# Altium PCB BOOSTXL-AUDIO_EVM.PcbDoc
Units mil, origin at the board's own origin, x right, y up, seen from the top; angles counter-clockwise.
Board outline 2300 x 3000 mil, 2 copper layers (Top Layer, Bottom Layer), stack 62 mil thick; 84 components, 83 nets, 242 pads, 141 vias.
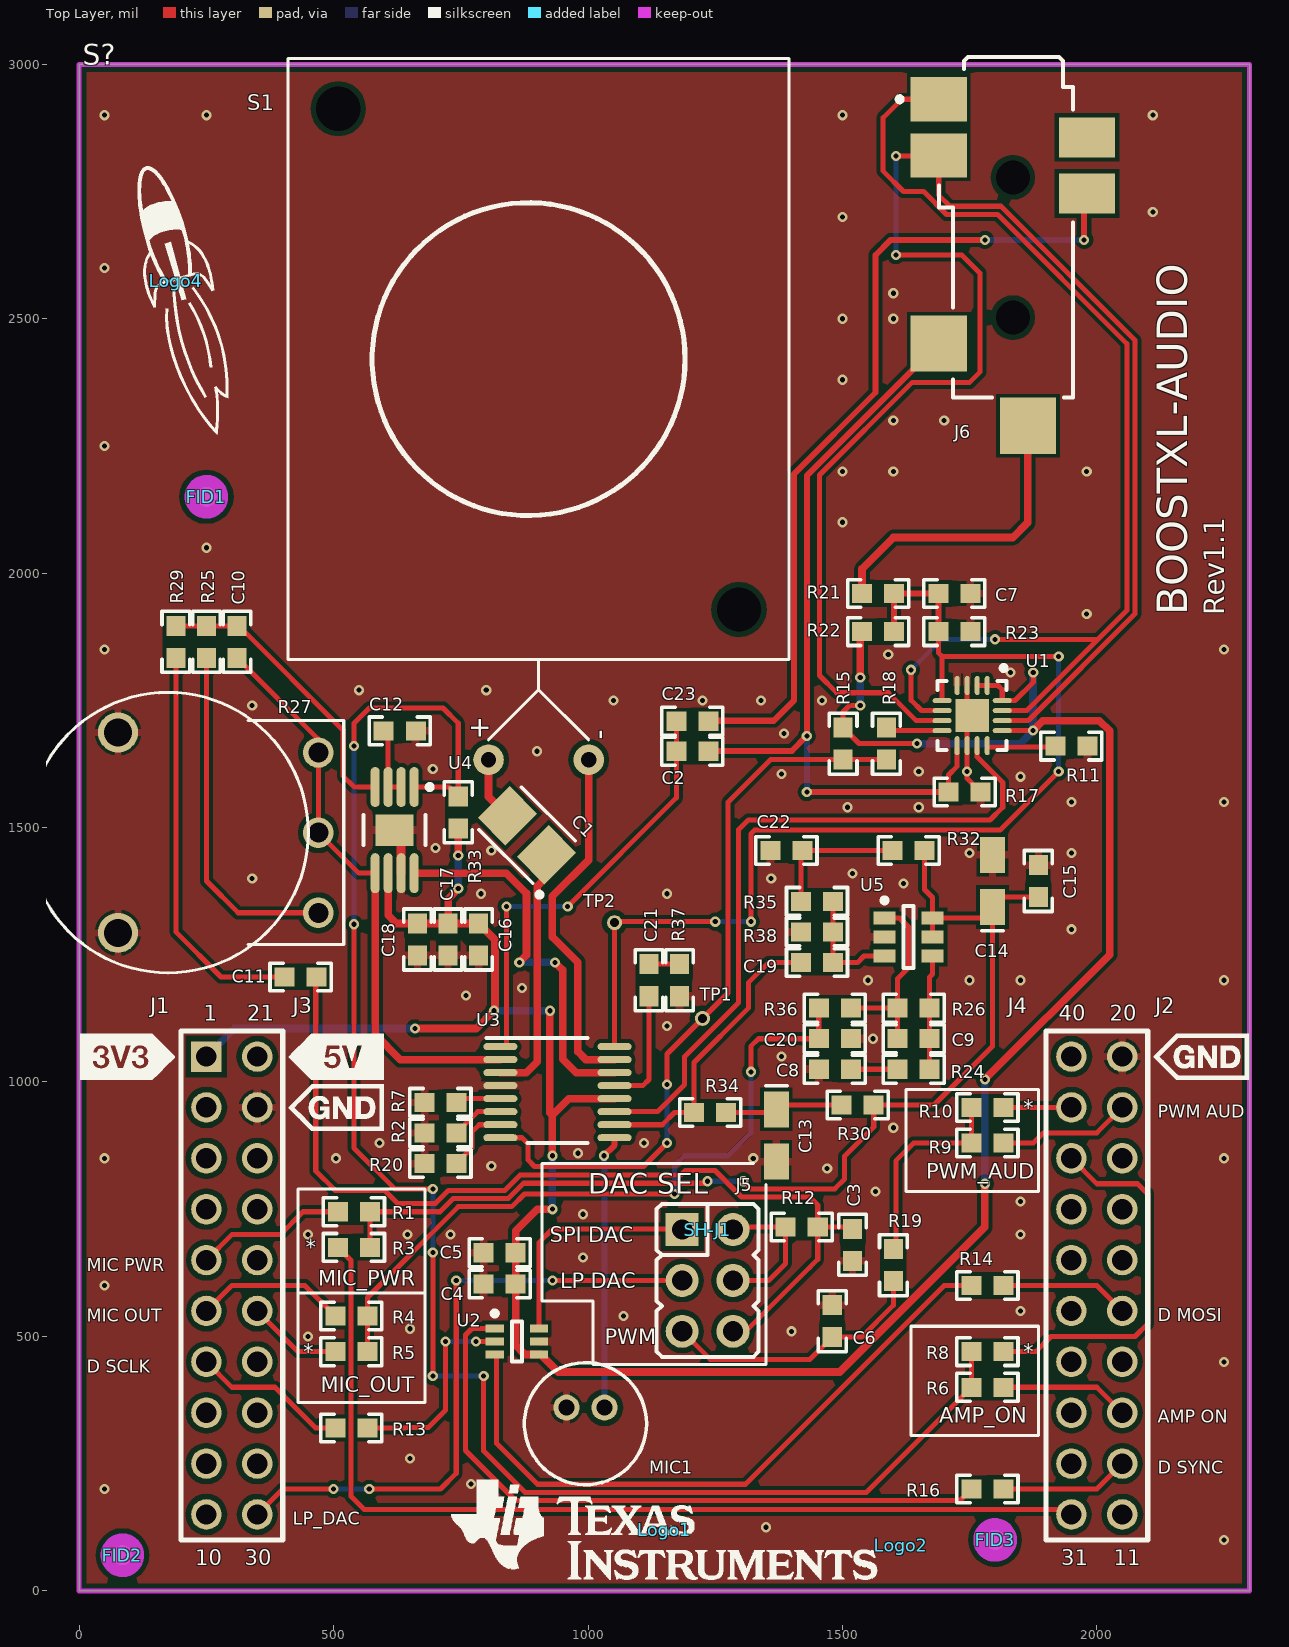
[diagram p0: Top Layer view]
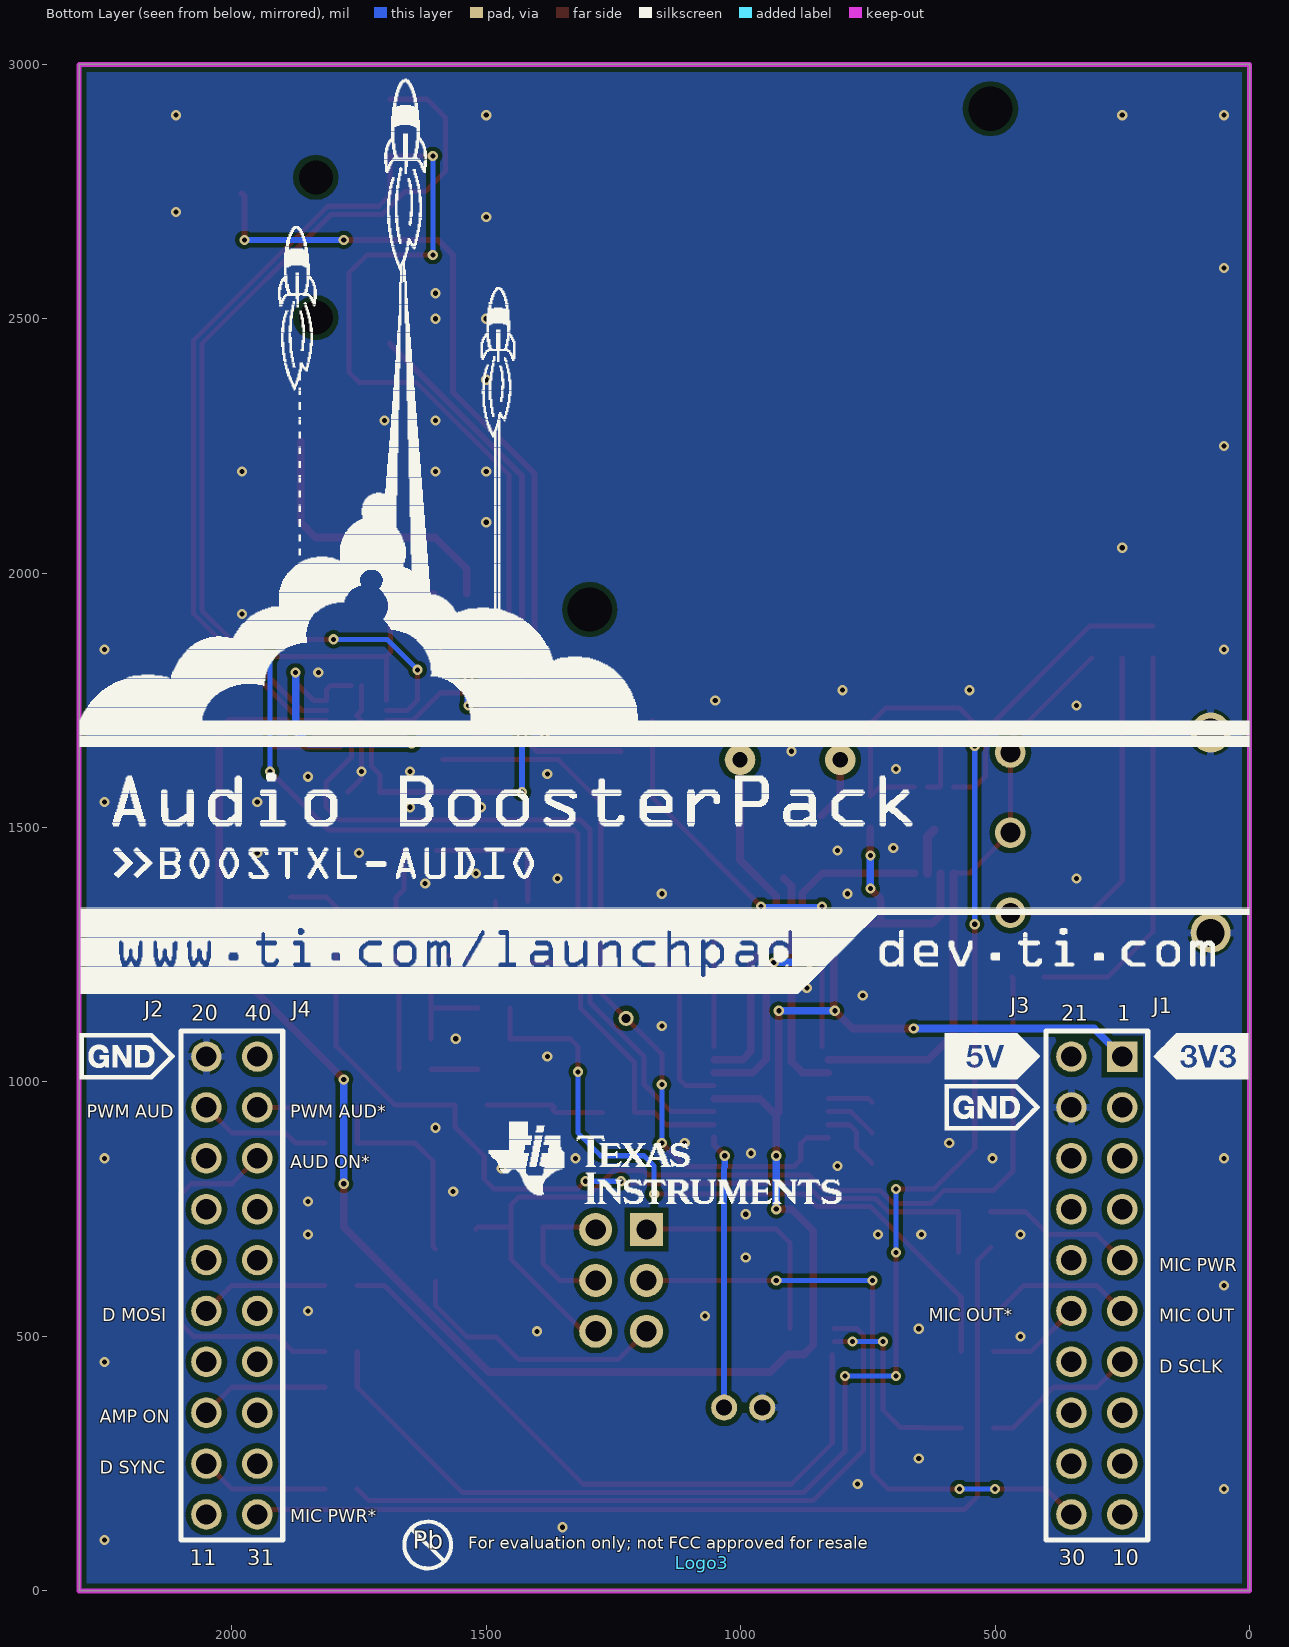
[diagram p1: Bottom Layer view, seen from below]

## Layer stack, top to bottom
Top Solder: solder mask 0.4, Solder Resist, Dk 3.5
Top Layer: signal copper 1.4
Dielectric1: core 59.2, FR-4, Dk 4.8
Bottom Layer: signal copper 1.4
Bottom Solder: solder mask 0.4, Solder Resist, Dk 3.5

## Board outline
0,0 0,3000 2300,3000 2300,0

## Design rules (kind name [scope] priority, off if disabled: settings)
AcuteAngle [All] p1: minimum=4.50000000000000E+0001 checktracksonly=FALSE
AssemblyTestPointUsage [All] p1: valid=2
Clearance Clearance_BoardEdge_MountingHoles [OnCopper and InComponentClass('Mounting Holes') vs IsKeepOut] p1: gap=20
Clearance Clearance_BoardEdge_Poly [OnCopper and InPoly vs IsKeepOut] p2: gap=10
Clearance Clearance_Poly [InPolygon] p3: gap=8 except(10.5: THPad-Poly)
Clearance [All] p4: gap=6
ComponentClearance ComponentClearance_Shunt [InComponentClass('Header') vs InComponentClass('Shunt')] p1 off: gap=0 collisioncheckmode=3 verticalgap=0 showdistances=FALSE
ComponentClearance ComponentClearance_Logo [InComponentClass('Logo')] p2 off: gap=50 collisioncheckmode=3 verticalgap=10 showdistances=FALSE
ComponentClearance ComponentClearance_ScrewToNut [(HasFootprint('NY PMS 440 0025 PH')) vs (HasFootprint('Keystone_1902C'))] p3 off: gap=5 collisioncheckmode=3 verticalgap=10 showdistances=FALSE
ComponentClearance ComponentClearance_MountingHoles [InComponentClass('Mounting Holes')] p4 off: gap=250 collisioncheckmode=3 verticalgap=100000 showdistances=FALSE
ComponentClearance ComponentClearance_SmallPassives [HasFootprint('0201*') or HasFootprint('0402*') or HasFootprint('0508') or HasFootprint('0603*') or HasFootprint('0612') or HasFootprint('0805*') or HasFootprint('0815*') or HasFootprint('0830*') or HasFootprint('1206*') or HasFootprint('1210*') or HasFootprint('1808*') or HasFootprint('1812*') or HasFootprint('1825*') or HasFootprint('2010*') or HasFootprint('2220*') or HasFootprint('2225*') or HasFootprint('2512*') or HasFootprint('2728*') or HasFootprint('3518*') vs HasFootprint('0201*') or HasFootprint('0402*') or HasFootprint('0508') or HasFootprint('0603*') or HasFootprint('0612') or HasFootprint('0805*') or HasFootprint('0815*') or HasFootprint('0830*') or HasFootprint('1206*') or HasFootprint('1210*') or HasFootprint('1808*') or HasFootprint('1812*') or HasFootprint('1825*') or HasFootprint('2010*') or HasFootprint('2220*') or HasFootprint('2225*') or HasFootprint('2512*') or HasFootprint('2728*') or HasFootprint('3518*')] p5 off: gap=20 collisioncheckmode=3 verticalgap=10 showdistances=FALSE
ComponentClearance ComponentClearance_THtoSMT [IsThruComponent vs IsSMTComponent] p6 off: gap=100 collisioncheckmode=3 verticalgap=30 showdistances=FALSE
ComponentClearance ComponentClearance_THtoTH [IsThruComponent vs IsThruComponent] p7 off: gap=118.11 collisioncheckmode=3 verticalgap=30 showdistances=FALSE
ComponentClearance [All] p8 off: gap=40 collisioncheckmode=3 verticalgap=10 showdistances=FALSE
DiffPairsRouting [All] p1: maxlimit=100 minlimit=10 mostfreqgap=10 toplayer_minwidth=15 toplayer_maxwidth=15 toplayer_prefwidth=15 bottomlayer_minwidth=15 bottomlayer_maxwidth=15 bottomlayer_prefwidth=15 maxuncoupledlength=1000
FabricationTestPointUsage TestPointUsage [All] p1: valid=2 allowmultiple=FALSE
FabricationTestpoint Testpoint [All] p1: side=3 testpointundercomponent=TRUE minsize=40 maxsize=100 preferedsize=60 minholesize=0 maxholesize=40 preferedholesize=32 testpointgrid=1 allowsidetop=TRUE allowsidebottom=TRUE usegrid=TRUE gridtolerance=0.01
FanoutControl Fanout_LCC [IsLCC] p1: bgadir=Out bgaviamode=Centered fanoutstyle=Auto fanoutdirection=Alternating viagrid=1 // Fanout_LCC (Default Rule)
FanoutControl Fanout_BGA [IsBGA] p2: bgadir=Out bgaviamode=Centered fanoutstyle=Auto fanoutdirection=Alternating viagrid=1 // Fanout_BGA (Default Rule)
FanoutControl Fanout_Default [All] p4: bgadir=Out bgaviamode=Centered fanoutstyle=Auto fanoutdirection=Alternating viagrid=1 // Fanout_Default (Default Rule)
FanoutControl Fanout_Small [(CompPinCount < 5)] p5: bgadir=Out bgaviamode=Centered fanoutstyle=Auto fanoutdirection=OutThenIn viagrid=1 // Fanout_Small (Default Rule)
HoleSize [All] p1: absolutevalues=TRUE maxlimit=251 minlimit=7 maxpercent=80.000 minpercent=20.000
MinimumAnnularRing MinimumAnnularRing_ThermalPadVias [IsVia and InAnyComponent] p1: minimumring=5.91
MinimumAnnularRing [All] p2: minimumring=2
MinimumSolderMaskSliver MinimumSolderMaskSliver_Logo [InComponentClass('Logo') vs InComponentClass('Logo')] p1: minsoldermaskwidth=0.7
MinimumSolderMaskSliver [All] p2: minsoldermaskwidth=3.94
PlaneClearance [All] p1: clearance=10
PlaneConnect [All] p1: planeconnectstyle=Relief reliefexpansion=10 reliefentries=4 reliefconductorwidth=10 reliefairgap=10
PolygonConnect PolygonConnect_via [IsVia] p1: connectstyle=Direct reliefconductorwidth=10 reliefentries=4 polygonreliefangle="90 Angle" airgapwidth=10
PolygonConnect [All] p2: connectstyle=Relief reliefconductorwidth=15 reliefentries=4 polygonreliefangle="90 Angle" airgapwidth=6
RoutingVias ThermalPadVias [IsVia and InAnyComponent] p1: holewidth=7.87 width=19.68 viastyle="Through Hole" minholewidth=7.87 minwidth=19.68 maxholewidth=12.99 maxwidth=23.62
RoutingVias [All] p2: holewidth=10 width=20 viastyle="Through Hole" minholewidth=6 minwidth=16 maxholewidth=40 maxwidth=65
SMDToCorner [All] p1: distance=30000
SilkToSilkClearance [All] p1: silktosilkclearance=5
SilkToSolderMaskClearance SilkscreenOverComponentPads [IsPad] p1 off: minsilkscreentomaskgap=5 clearancetoexposedcopper=TRUE
SolderMaskExpansion SolderMaskExpansion_vias [IsVia] p1: expansion=-25
SolderMaskExpansion [All] p2: expansion=3
UnpouredPolygon [All] p1: allowunpoured=FALSE
Width "Schematic Width Constraint" [InNet('+5.0V')] p1: maxlimit=20 minlimit=15 preferedwidth=15
Width [All] p2: maxlimit=100 minlimit=6 preferedwidth=10 checkconnectedcopper=TRUE
14 further rules are at their usual default settings.

## Classes and differential pairs
component class Shunt: SH-J1
component class Logo: Logo1
component class BOOSTXL-AUDIO_EVM_Hardware: FID1 FID2 FID3 Logo1 Logo2 Logo3 Logo4 S? ZZ1 ZZ2 ZZ3 ZZ4
component class FiducialMark: FID1 FID2 FID3
component class AssemblyNote: ZZ1 ZZ2 ZZ3 ZZ4
component class BOOSTXL-AUDIO_Main: C1 C2 C3 C4 C5 C6 C7 C8 C9 C10 C11 C12 C13 C14 C15 C16 C17 C18 C19 C20 C21 C22 C23 J1 J5 J6 MIC1 R1 R2 R3 R4 R5 R6 R7 R8 R9 R10 R11 R12 R13 R14 R15 R16 R17 R18 R19 R20 R21 R22 R23 R24 R25 R26 R27 R29 R30 R32 R33 R34 R35 R36 R37 R38 S1 SH-J1 TP1 TP2 U1 U2 U3 U4 U5
component class Header: J5

## Components (designator, comment, footprint, x,y, rotation, side; value= is the part's Value field where it differs from the comment)
C1 "TPSB476K010R0250" 3528-21 880,1485 r135 top
C2 "C1608X5R1A106M" 0603 1205,1650 r0 top
C3 "GRM188R71C823KA01D" 0603 1520,680 r90 top
C4 "C1608X5R1A106M" 0603 826.19,603.1 r180 top
C5 "GRM188R70J104KA01D" 0603 826.19,664.42 r180 top
C6 "C0603C334K8RACTU" 0603 1480,530 r90 top
C7 "GRM188R71C105KA12D" 0603 1720,1960 r180 top
C8 "GRM188R60J474KA01D" 0603 1485,1025 r0 top
C9 "GRM1885C2A510JA01D" 0603 1640,1085 r180 top
C10 "CC0603CRNPO9BN5R0" 0603 310,1865 r270 top
C11 "GRM188R71A564KA61D" 0603 435,1206.5 r0 top
C12 "GRM188R61A225KE34D" 0603 630,1690 r0 top
C13 "TPSA475K010R1400" 3216-18 1370,895 r270 top
C14 "TPSA475K010R1400" 3216-18 1795,1395 r90 top
C15 "GRM188R70J104KA01D" 0603 1885,1395 r90 top
C16 "C1608X5R1A106M" 0603 785,1280 r90 top
C17 "GRM188R70J104KA01D" 0603 725,1280 r90 top
C18 "GRM188R61A225KE34D" 0603 665,1280 r270 top
C19 "GRM188R61A154KA01D" 0603 1450,1235 r0 top
C20 "C0603C153K1RACTU" 0603 1485,1085 r0 top
C21 "GRM188R70J104KA01D" 0603 1120,1200 r270 top
C22 "GRM188R60J474KA01D" 0603 1390,1455 r0 top
C23 "C1608X5R1A106M" 0603 1205,1708.96 r0 top
FID1 "Fiducial" Fiducial10-20 250,2150 r0 top
FID2 "Fiducial" Fiducial10-20 85,70 r0 top
FID3 "Fiducial" Fiducial10-20 1800,100 r0 top
J1 "CRD-081413-A-G (requires 2)" "40Pin BP" 1150,600 r0 top
J5 "PBC03DAAN" Sullins_PBC03DAAN 1235,610 r0 top
J6 "SJ-43516-SMT-TR" CUI_SJ-43516-SMT 1835,2640 r0 top
Logo1 "Texas Instruments" TI_Stacked_Overlay_Small 1150,120 r0 top
Logo2 "Pb-Free Symbol" Pb-Free_Overlay_Small 1615,90 r180 top
Logo3 "FCC disclaimer" FCC_disclaimer 1076.52,55.48 r180 bottom
Logo4 "LaunchPad Rocket" LaunchPadRocket_Small 190,2575 r65 top
MIC1 "POM-2242P-C33-R" MIC_POM-2242P-C33-R 995,360 r180 top
R1 "CRCW06030000Z0EA" 0603 540,745 r180 top
R2 "CRCW060350R0FKEA" 0603 710,900 r180 top
R3 "CRCW06030000Z0EA" 0603 540,675 r180 top
R4 "CRCW06030000Z0EA" 0603 535,540 r180 top
R5 "CRCW06030000Z0EA" 0603 535,470 r180 top
R6 "CRCW06030000Z0EA" 0603 1785,400 r0 top
R7 "CRCW060350R0FKEA" 0603 710,960 r180 top
R8 "CRCW06030000Z0EA" 0603 1785,470 r0 top
R9 "CRCW06030000Z0EA" 0603 1785,880 r0 top
R10 "CRCW06030000Z0EA" 0603 1785,950 r0 top
R11 "CRCW06030000Z0EA" 0603 1950,1660 r180 top
R12 "RC0603FR-07100RL" 0603 1420,715 r0 top
R13 "CRCW06030000Z0EA" 0603 535,320 r0 top
R14 "CRCW06030000Z0EA" 0603 1785,600 r180 top
R15 "RC0603FR-0747KL" 0603 1501.3,1665 r270 top
R16 "CRCW06030000Z0EA" 0603 1785,200 r180 top
R17 "RC0603FR-0710KL" 0603 1740,1570 r0 top
R18 "RC0603FR-0720KL" 0603 1586.3,1665 r90 top
R19 "RC0603FR-07130RL" 0603 1600,640 r270 top
R20 "CRCW060350R0FKEA" 0603 710,840 r180 top
R21 "RC0603FR-0710KL" 0603 1570,1960 r0 top
R22 "CRCW0603100KFKEA" 0603 1570,1885 r0 top
R23 "RC0603FR-07220KL" 0603 1720,1885 r0 top
R24 "RC0603FR-07820RL" 0603 1640,1025 r180 top
R25 "CRCW06030000Z0EA" 0603 250,1865 r270 top
R26 "RC0603FR-07200KL" 0603 1640,1145 r180 top
R27 "RV100F-30-4K1-B15" RV100F-30-4K1-B15 470,1490 r90 top
R29 "RC0603FR-0730KL" 0603 190,1865 r90 top
R30 "RC0603FR-07470RL" 0603 1530,955 r180 top
R32 "RC0603FR-073KL" 0603 1630,1455 r0 top
R33 "CRCW0603100KFKEA" 0603 745,1530 r90 top
R34 "RC0603FR-078K2L" 0603 1240,940 r0 top
R35 "RC0603FR-0747KL" 0603 1450,1355 r180 top
R36 "RC0603FR-07820RL" 0603 1485,1145 r180 top
R37 "RC0603FR-07510RL" 0603 1180,1200 r90 top
R38 "RC0603FR-0751KL" 0603 1450,1295 r0 top
S1 "ASE03008MR-LW150-R" ASE03008MR-LW150-R 1395,1830 r90 top
S? "" BOOSTXL-AUDIO_RearSilk 2305,1160 r0 top
SH-J1 "969102-0000-DA" SNT-100-BK-G 1235,710 r180 top
TP1 "TESTPOINT" TP_H045P075 1225,1125 r90 top
TP2 "TESTPOINT" TP_H045P075 1052.2,1312.96 r90 top
U1 "TS3A225E" "QFN-16 (RTE)" 1755,1720 r270 top
U2 "DAC8311IDCKT" TI-DCK6_V 860,490 r0 top
U3 "TS3A44159PWR" PW0016A_N 940,980 r0 top
U4 "TPA301DGNG4" TI-DGN8-1760X1425TP_M 620,1495 r270 top
U5 "TLV2760IDBVTG4" DBV0006A_N 1630,1285 r0 top
ZZ1 "This Assembly Note is for PCB labels only" AssemblyNoteLabel 185,3938 r0 top
ZZ2 "These assemblies are ESD sensitive, ESD precautions shall be observed." AssemblyNote 185,3829.11 r0 top
ZZ3 "These assemblies must be clean and free from flux and all contaminants. Use of no clean flux is not acceptable." AssemblyNote 185,3740.56 r0 top
ZZ4 "These assemblies must comply with workmanship standards IPC-A-610 Class 2, unless otherwise specified." AssemblyNote 185,3652 r0 top

## Footprints (in the part's own frame and the unit in brackets; to place one, negate y for a bottom-side part, rotate by r counter-clockwise, add the part's x,y. Pads: shape width x height; smd on the part's side, far side on the other; paste and mask are expansions set on the pad)
"40Pin BP" [mil] "40Pin Booster Pack Connection (Top - male; Bottom - female)"
  rect 60x60 hole 40: 1(-900,450)
  round 60 hole 40: 2(-900,350) 3(-900,250) 4(-900,150) 5(-900,50) 6(-900,-50) 7(-900,-150) 8(-900,-250) 9(-900,-350) 10(-900,-450) 11(900,-450) 12(900,-350) 13(900,-250) 14(900,-150) 15(900,-50) 16(900,50) 17(900,150) 18(900,250) 19(900,350) 20(900,450) 21(-800,450) 22(-800,350) 23(-800,250) 24(-800,150) 25(-800,50) 26(-800,-50) 27(-800,-150) 28(-800,-250) 29(-800,-350) 30(-800,-450) 31(800,-450) 32(800,-350) 33(800,-250) 34(800,-150) 35(800,-50) 36(800,50) 37(800,150) 38(800,250) 39(800,350) 40(800,450)
  silkscreen extent -1148,305 1148,495, body extent -950,-500 950,500, height 335
0603 [mm] "0603 from SM-752 data"
  rect 1x0.95 smd: 1(-0.8,0) 2(0.8,0)
  silkscreen extent -1.52,-0.69 1.52,0.69, body extent -0.87,-0.47 0.87,0.47, height 1
3216-18 [mm] "Medium density IPC, based on Kemet T495 dimensions"
  rect 1.8x1.25 smd: 1(-1.3,0) 2(1.3,0)
  silkscreen extent -2.49,-0.54 -2.49,0.54, body extent -1.7,-0.9 1.7,0.9, height 1.8
3528-21 [mm] "Medium Density IPC, based on SM-782 section 8.4"
  rect 1.95x2.25 smd: 1(-1.375,0) 2(1.375,0)
  silkscreen extent -2.66,-1.5 1.9,1.79, body extent -1.85,-1.5 1.85,1.5, height 2.1
ASE03008MR-LW150-R [mil] "PUI Speaker Enclosure 1W"
  round 60 hole 30: 1(-196.85,590.55) 2(-196.85,393.7)
  round 0 hole 86.61 unplated: ""(98.43,98.43) ""(1082.68,885.83)
  silkscreen extent -157,0 1181,984, body extent 0,0 1181,984, height 236
AssemblyNote [mil] "Assembly Note"
AssemblyNoteLabel [mil] "Assembly Note for PCB Labels"
BOOSTXL-AUDIO_RearSilk [mil]
  round 1 on Mech4: 0(-1117.87,1323.46)
CUI_SJ-43516-SMT [mm] "AUDIO JACK 3.5mm 4COND, SMT"
  rect 2.8x2.2 smd: 1(-3.7,7.4) 4(-3.7,4.6)
  rect 2.8x2.8 smd: 2(-3.7,-4.8) 5(0.75,-8.9)
  rect 2.8x2 smd: 3(3.7,2.7) 6(3.7,5.5)
  round 0 hole 1.7 unplated: MH1(0,3.5) MH2(0,-3.5)
  silkscreen extent -5.77,-7.5 3,9.5, body extent -4.5,-9.5 4.5,9.7, height 5.1
DBV0006A_N [mm] "SOT23, 6-Leads, Body 2.9x1.6mm, Pitch 0.95mm, Lead Span 2.8mm, IPC Medium Density"
  rect 1.1x0.65 smd: 1(-1.2,0.95) 2(-1.2,0) 3(-1.2,-0.95) 4(1.2,-0.95) 5(1.2,0) 6(1.2,0.95)
  silkscreen extent -1.32,-1.55 0.25,1.95, body extent -1.42,-1.46 1.42,1.46, height 1.11
FCC_disclaimer [mil]
Fiducial10-20 [mm]
  round 1 smd mask+0.5: 1(0,0)
  Top Layer keep-out circle w1.178: c0,0 r0.5
LaunchPadRocket_Small [mil]
  silkscreen extent -241,-202 182,153
MIC_POM-2242P-C33-R [mm] "POM Audio"
  round 1.3 hole 0.8: 1(-0.95,0) 2(0.95,0)
  silkscreen extent -3.05,-2.25 3.05,3.85, body extent -3.05,-2.24 3.05,3.84, height 2.5
Pb-Free_Overlay_Small [mil]
PW0016A_N [mm] "TSOP, 16-Leads, Body 5x4.4mm, Pitch 0.65mm, IPC Medium Density"
  oval 1.7x0.35 smd: 1(-2.85,2.275) 2(-2.85,1.625) 3(-2.85,0.975) 4(-2.85,0.325) 5(-2.85,-0.325) 6(-2.85,-0.975) 7(-2.85,-1.625) 8(-2.85,-2.275) 9(2.85,-2.275) 10(2.85,-1.625) 11(2.85,-0.975) 12(2.85,-0.325) 13(2.85,0.325) 14(2.85,0.975) 15(2.85,1.625) 16(2.85,2.275)
  silkscreen extent -3.55,-2.55 1.5,2.7, body extent -3.21,-2.5 3.21,2.5, height 0.98
"QFN-16 (RTE)" [mm] "QFN, 16-Leads, Body 3.00x3.00mm, Pitch 0.50mm, Thermal Pad 1.66x1.66mm, IPC Low Density"
  oval 0.95x0.25 smd: 1(-1.5,0.75) 2(-1.5,0.25) 3(-1.5,-0.25) 4(-1.5,-0.75) 9(1.5,-0.75) 10(1.5,-0.25) 11(1.5,0.25) 12(1.5,0.75)
  oval 0.25x0.95 smd: 5(-0.75,-1.5) 6(-0.25,-1.5) 7(0.25,-1.5) 8(0.75,-1.5) 13(0.75,1.5) 14(0.25,1.5) 15(-0.25,1.5) 16(-0.75,1.5)
  rect 1.66x1.66 smd: 17(0,0)
  silkscreen extent -2.5,-1.73 1.73,1.73, body extent -1.58,-1.58 1.58,1.58, height 0.8
RV100F-30-4K1-B15 [mm]
  round 1.524 hole 1: 1(-4,0) 2(0,0) 3(4,0)
  round 2 hole 1.4: GND(-5,10) GND(5,10)
  silkscreen extent -7,-1.27 7,14.5
SNT-100-BK-G [mil] "Samtec STEP model"
  round 1 on Mech3: 0(0,0)
  body extent -100,-50 100,50, height 344
Sullins_PBC03DAAN [mm] "Sullins 100mil, 2x3, 230 mil above insulator"
  rect 1.65x1.65 hole 1.016: 1(-1.27,2.54)
  round 1.65 hole 1.016: 2(1.27,2.54) 3(-1.27,0) 4(1.27,0) 5(-1.27,-2.54) 6(1.27,-2.54)
  silkscreen extent -2.54,-3.81 2.54,3.81, body extent -2.54,-3.81 2.54,3.81, height 8.38
TI-DCK6_V [mm] "SOT23, 6-Leads, Body 2x1.25mm, Pitch 0.65mm"
  rect 0.9x0.4 smd: 1(-1.1,0.65) 2(-1.1,0) 3(-1.1,-0.65) 4(1.1,-0.65) 5(1.1,0) 6(1.1,0.65)
  silkscreen extent -1.22,-1 0.25,1.52, body extent -0.63,-1 0.63,1, height 1.1
TI-DGN8-1760X1425TP_M [mm] "SOP, 8-Leads, Body 3.1x3.1mm, Pitch 0.65mm, Thermal Pad 1.89x1.57mm, IPC Low Density"
  oval 2x0.45 smd: 1(-2.15,0.975) 2(-2.15,0.325) 3(-2.15,-0.325) 4(-2.15,-0.975) 5(2.15,-0.975) 6(2.15,-0.325) 7(2.15,0.325) 8(2.15,0.975)
  rect 1.57x1.89 smd: 9(0,0)
  silkscreen extent -2.27,-1.55 0.75,1.88, body extent -1.55,-1.55 1.55,1.55, height 1.1
TI_Stacked_Overlay_Small [mil]
  silkscreen extent -418,-98 418,98
TP_H045P075 [mm] "TP_H0.45P0.75"
  round 0.75 hole 0.45: 1(0,0)

## Part data
C1: "CAP, TA, 47 µF, 10 V, +/- 10%, 0.25 ohm, SMD"
C2 C4 C16 C23: "CAP, CERM, 10 µF, 10 V, +/- 20%, X5R, 0603"
C3: "CAP, CERM, 0.082 µF, 16 V, +/- 10%, X7R, 0603"
C5 C15 C17 C21: "CAP, CERM, 0.1uF, 6.3V, +/-10%, X7R, 0603"
C6: "CAP, CERM, 0.33 µF, 10 V, +/- 10%, X7R, 0603"
C7: "CAP, CERM, 1 µF, 16 V, +/- 10%, X7R, 0603"
C8 C22: "CAP, CERM, 0.47uF, 6.3V, +/-10%, X5R, 0603"
C9: "CAP, CERM, 51 pF, 100 V, +/- 5%, C0G/NP0, 0603"
C10: library part Capacitor, "CAP, CERM, 5 pF, 50 V, +/- 5%, C0G/NP0, 0603"
C11: "CAP, CERM, 0.56 µF, 10 V, +/- 10%, X7R, 0603"
C12 C18: "CAP, CERM, 2.2 µF, 10 V, +/- 10%, X5R, 0603"
C13 C14: "CAP, TA, 4.7 µF, 10 V, +/- 10%, 1.4 ohm, SMD"
C19: "CAP, CERM, 0.15uF, 10V, +/-10%, X5R, 0603"
C20: "CAP, CERM, 0.015 µF, 100 V, +/- 10%, X7R, 0603"
FID1 FID2 FID3: "Fiducial mark.  There is nothing to buy or mount."
J1: library part "40Pin Booster Pack Connection", "40Pin Booster Pack Connection"
J5: "Header, 100mil, 3x2, Gold, TH"
J6: "AUDIO JACK 3.5mm 4COND, SMT"
Logo1: library part TI_Logo, "Texas Instrument Corporate Signature"
Logo2: library part Pb-Free
Logo3: library part FCC_disclaimer, "FCC_disclaimer"
Logo4: library part LaunchPad_Rocket, "LaunchPad Rocket logo"
MIC1: "Microphone, Condenser, Analog, Omnidirectional, -42DB, TH"
R1 R3 R4 R5 R6 R8 R9 R10 R11 R13 R14 R16 R25: "RES, 0, 5%, 0.1 W, 0603"
R2 R7 R20: "RES, 50, 1%, 0.1 W, 0603"
R12: "RES, 100, 1%, 0.1 W, 0603"
R15 R35: "RES, 47.0 k, 1%, 0.1 W, 0603"
R17 R21: "RES, 10.0 k, 1%, 0.1 W, 0603"
R18: "RES, 20.0 k, 1%, 0.1 W, 0603"
R19: "RES, 130, 1%, 0.1 W, 0603"
R22 R33: "RES, 100 k, 1%, 0.1 W, 0603"
R23: "RES, 220 k, 1%, 0.1 W, 0603"
R24 R36: "RES, 820 ohm, 1%, 0.1W, 0603"
R26: "RES, 200 k, 1%, 0.1 W, 0603"
R27: "Potentiometers 10mm Linear 100K PC Mount"
R29: "RES, 30.0 k, 1%, 0.1 W, 0603"
R30: "RES, 470 ohm, 1%, 0.1W, 0603"
R32: "RES, 3.00 k, 1%, 0.1 W, 0603"
R34: "RES, 8.20k ohm, 1%, 0.1W, 0603"
R37: "RES, 510, 1%, 0.1 W, 0603"
R38: "RES, 51.0 k, 1%, 0.1 W, 0603"
S1: library part "PUI Speaker Enclosure", "PUI SPEAKER ENCLOSURE 1 W 8 OHM 83 D"
S?: library part "Rear Silkscreen", "Rear Silkscreen"
SH-J1: "Shunt, 100mil, Gold plated, Black"
TP1 TP2: library part TP_H0.45P0.75, "Testpoint"
U1: "Autonomous Audio Switch with Headset Type Detection"
U2: library part CMP-0004-00352-1, "14-Bit, Single Channel, 80 uA, 1.8 to 5.5 V DAC, -40 to 125 degC, 6-pin SOT23 (DCK6), Green (RoHS & no Sb/Br)"
U3: "0.45 ohm QUAD SPDT ANALOG SWITCH QUAD-CHANNEL 2:1 MULTIPLEXER/DEMULTIPLEXER WITH TWO CONTROLS, PW0016A"
U4: library part CMP-0991-00051-1, "350-mW Mono Class-AB Audio Amplifier, -40 to 85 degC, 8-pin SOP (DGN8), Green (RoHS & no Sb/Br)"
U5: "Single MicroPower, Rail-to-Rail, Single Supply Amplifier with Shutdown, 1.8 to 3.6 V, -40 to 85 degC, 6-pin SOT23 (DBV0006A), Green (RoHS & no Sb/Br)"
ZZ1: library part AssemblyNoteLabel
ZZ2 ZZ3 ZZ4: library part AssemblyNote

## Via types
v1: diameter 20, hole 10, Top Layer to Bottom Layer, 141 vias

## Nets (pads, with @x,y where several pads share a name; then routed paths per layer and width w, separated by ;. In a path a pad name is that pad's centre, name@x,y a point inside that pad or via, vN(x,y) a via of type N, cw(c..) or ccw(c..) an arc to the next point about the centre after c; other vN are vias at no path point)
+3.3V: C4.1 C5.1 C16.2 C17.2 C18.1 J1.1 R15.1 R22.1 R33.1 U1.1 U1.2 U1.13 U1.16 U2.4 U3.12 U4.6 | length 5469.2
  Top Layer w10: v1(1535,1740) 1514.1,1740 1501.3,1727.2 R15.1 1532.8,1665 v1(1646.31,1665) ; R22.1@1535,1881.5 R22.1 ; U1.2 U1.1 1805.94,1779.06 1814.06,1770.94 U1.16 1839.27,1749.53 1875,1785.25 v1(1875,1805) ; U1.13 v1(1874.53,1690.47)
  Top Layer w15: U4.6 607.2,1327.8 623.5,1311.5 C18.1 C17.2 ; v1(660,1105) 780,1105 v1(815,1140) 817.2,1142.2 817.2,1279.3 C16.2 C17.2 ; v1(745,1380) 725,1360 C17.2 ; v1(745,1445) R33.1 ; v1(925,1140) 925,940 930,935 ; v1(930,750) 900,750 857.68,707.68 C5.1 C4.1 857.68,482.32 875.59,464.41 907.24,464.41 941.65,430 1495,430 1780,715 v1(1780,800) ; v1(930,855) 930,935 ; U3.12 962.2,967.2 930,935 ; v1(1535,1795) R22.1@1535,1881.5 ; v1(1780,1005) 2025,1250 2025,1690 2005,1710 1894.06,1710 v1(1874.53,1690.47)
  Bottom Layer w10: v1(1535,1740) 1538.5,1743.5 v1@1535,1747.01 ; v1@1874.53,1804.53 v1(1875,1805)
  Bottom Layer w15: J1.1 305,1105 v1(660,1105) ; v1(745,1380) v1(745,1445) ; v1(815,1140) v1(925,1140) ; v1(930,750) v1(930,855) ; v1@1535,1747.01 v1(1535,1795) ; v1(1646.31,1665) 1849.06,1665 v1(1874.53,1690.47) v1@1874.53,1804.53 ; v1(1780,800) v1(1780,1005)
+5.0V: J1.21
\AMP_ON_ALT: J1.38 R8.2 | length 740.3
  Top Layer w10: R8.2 1880,470 1910,500 2075,500 2100,525 2100,780 2080,800 2000,800 J1.38
\AMP_ON_PRI: J1.13 R6.2 | length 254.2
  Top Layer w10: R6.2 2000,400 J1.13
\AUDIO_SHUTDOWN: R6.1 R8.1 R33.2 U4.1 | length 3253.5
  Top Layer w10: v1(540,1310) 540,870 620,790 v1(695,790) ; v1(540,1660) 540,1705 570,1735 715,1735 745,1705 R33.2 726.85,1579.65 U4.1 ; v1(695,422) v1(695,665) ; v1(795,422) 795,275 876.55,193.45 1546.95,193.45 R6.1 R8.1
  Bottom Layer w10: v1(540,1310) v1(540,1660) ; v1(695,422) v1(795,422) ; v1(695,665) v1(695,790)
\DAC_SYNC: J1.12 R16.1 | length 254.2
  Top Layer w10: R16.1 2000,200 J1.12
AMP_AUDIO_OUT+: C10.2 R27.2 R27.3 U3.2 U4.5 | length 1138
  Top Layer w10: C10.2 470,1673.5 R27.3 R27.2 549.65,1410.35 U4.5
  Top Layer w15: U4.5 581.61,1093.39 631.02,1043.98 U3.2
AMP_AUDIO_OUT-: U3.14 U4.8 | length 758.2
  Top Layer w15: U4.8 839.65,1410.35 879,1371 879,1249 v1(865,1235) ; v1(935,1235) 950,1220 950,1045 976.61,1018.39 U3.14
  Bottom Layer w15: v1(865,1235) v1(935,1235)
AUDIO_OUT: C3.2 C11.2 J5.6 R12.2 | length 1852.1
  Top Layer w10: C11.2 465,1205 465,825 503,787 600,787 626,761 700,761 726,787 836.75,787 866.75,817 1182.3,817 1191.3,826 1249.44,826 1301.44,774 1436,774 1451.5,758.5 R12.2 ; J5.6 1310,510 1435.75,635.75 1451.5,651.5 R12.2 ; C3.2 1516.5,715 R12.2
DAC_MOSI: J1.15 R14.1 | length 254.2
  Top Layer w10: R14.1 2000,600 J1.15
DAC_SCLK: J1.7 R13.1 | length 307.4
  Top Layer w10: J1.7 300,400 385,400 465,320 R13.1
DUMMY_LOAD: C21.2 U3.13 | length 236.4
  Top Layer w10: U3.13 1107.8,992.8 1120,1005 C21.2
GND: C3.1 C4.2 C5.2 C6.2 C7.1 C8.1 C12.2 C13.2 C14.2 C15.2 C16.1 C17.1 C18.2 C20.2 C22.1 J1.20 J1.22 MIC1.2 R2.2 R7.2 R11.1 R17.2 R20.2 R23.2 R27.GND R37.1 R38.1 U1.3 U1.4 U1.10 U1.17 U2.5 U3.4 U4.7 U4.9 U5.2 | length 318.1
  Top Layer w10: U1.3 1745.16,1729.84 U1.17 1745.16,1710.16 U1.10 1745.16,1596.34 R17.2
  Top Layer w18: U4.9 632.8,1482.2 U4.7
  other v1: 2250,100 1350,125 50,200 770,210 650,260 2250,450 450,500 1400,510 650,515 1070,540 1850,550 50,600 990,655 450,700 645,700 730,700 1850,700 990,740 1850,765 1565,785 1470,830 810,835 50,850 505,850 1324.72,850 2250,850 980,860 590,880 1110,880 1600,910 1380,1050 1560,1085 1155,1110 760,1170 870,1185 1550,1200 1750,1200 1850,1200 2250,1200 1950,1300 790,1370 1155,1370 1620,1390 340,1400 1360,1400 1520,1410 1750,1450 1950,1450 810,1455 700,1460 1510,1540 1650,1540 1950,1550 2250,1550 1850,1600 1380,1605 1650,1610 1745,1610 695,1615 900,1650 1385,1685 340,1740 1050,1750 1225,1750 1340,1750 1460,1750 550,1770 800,1770 1830,1805 1590,1840 50,1850 2250,1850 1980,1920 250,2050 1500,2100 1500,2200 1600,2200 1980,2200 50,2250 1600,2300 1700,2300 1500,2380 1500,2500 1600,2500 1600,2550 50,2600 1500,2700 2110,2710 50,2900 250,2900 1500,2900 2110,2900
HEADPHONE_OUT: C2.1 C23.1 U3.1 | length 848.4
  Top Layer w10: U3.1@840,1070 v1(840,1345) ; v1(960,1345) 1173.5,1558.5 C2.1 C23.1@1173.5,1710
  Bottom Layer w10: v1(840,1345) v1(960,1345)
HEADSET_MIC: U1.11 U3.11 | length 1383.8
  Top Layer w10: U3.11 1136.61,941.61 1190,995 1190,1050 1296,1156 1296,1496 1315,1515 1790,1515 1815,1540 1815,1588.68 1764.84,1638.84 U1.11
HP_LEFT: C2.2 J6.2 R17.1 U1.9 | length 1570.8
  Top Layer w10: R17.1 1708.5,1603.5 1725.47,1620.47 U1.9
  Top Layer w12: C2.2 1237,1650.5 1400.5,1650.5 v1(1430,1680) 1430,2191.69 J6.2 ; v1(1430,1570) R17.1
  Bottom Layer w12: v1(1430,1570) v1(1430,1680)
HP_RIGHT: C23.2 J6.3 | length 1642.4
  Top Layer w12: C23.2@1236.5,1710 1365,1710 1405,1750 1405,2195 1565,2355 1565,2625 1595,2655 v1(1780,2655) ; v1(1975,2655) 1975,2740.63 J6.3
  Bottom Layer w12: v1(1780,2655) v1(1975,2655)
J1.2: J1.2
J1.3: J1.3
J1.4: J1.4
J1.8: J1.8
J1.9: J1.9
J1.10: J1.10
J2.11: J1.11
J2.14: J1.14
J2.16: J1.16
J2.17: J1.17
J2.18: J1.18
J3.23: J1.23
J3.24: J1.24
J3.25: J1.25
J3.27: J1.27
J3.28: J1.28
J3.29: J1.29
J4.32: J1.32
J4.33: J1.33
J4.34: J1.34
J4.35: J1.35
J4.36: J1.36
J4.37: J1.37
J4.40: J1.40
LAUNCHPAD_DAC_OUT: J1.30 J5.3 | length 1247.6
  Top Layer w10: J1.30 400,200 v1(500,200) ; v1(570,200) 710,200 741,231 v1(741,610) ; v1(930,610) J5.3
  Bottom Layer w10: v1(500,200) v1(570,200) ; v1(741,610) v1(930,610)
LOUDSPEAKER_OUT+: C1.1 U3.3 | length 447.4
  Top Layer w15: U3.3 878.39,1018.39 900,1040 900,1385 C1.1@915,1400
LOUDSPEAKER_OUT-: S1.2 U3.15 | length 702.2
  Top Layer w15: S1.2 1001.3,1436.3 930,1365 930,1285 980,1235 980,1060 996.02,1043.98 U3.15
MIC_DET: R15.2 R18.1 TP1.1 U3.8 | length 1453.7
  Top Layer w10: U3.8 870.12,890.43 881.97,878.58 881.97,847.03 895,834 1109,834 v1(1155,880) ; v1(1155,995) 1155,1055 TP1.1 1275,1175 1275,1550 1358.5,1633.5 R15.2 R18.1
  Bottom Layer w10: v1(1155,880) v1(1155,995)
MIC_OUT: C20.1 R4.1 R5.1 R36.2 | length 1427.8
  Top Layer w10: R5.1 566.5,576.5 745,755 850,755 875,780 v1(1170,780) ; v1(1320,1020) 1320,1070 1335,1085 C20.1 R36.2
  Bottom Layer w10: v1(1170,780) 1170,835 1190,855 1275,855 ; 1297.5,877.5 1275,855 ; v1(1320,1020) 1320,900 1275,855
MIC_OUT_ALT: J1.26 R5.2 | length 186.6
  Top Layer w10: J1.26 430,470 R5.2
MIC_OUT_PRI: J1.6 R4.2 | length 299.1
  Top Layer w10: J1.6 300,600 443.5,600 R4.2
MIC_PWR: C14.1 C15.1 R1.1 R3.1 R30.1 R32.2 U5.5 U5.6 | length 2169.7
  Top Layer w10: R3.1@571.5,665 R3.1 R1.1 709,745 735,771 843.37,771 873.37,801 1231,801 v1(1235,805) ; v1(1305,805) 1320,790 1485,790 1504,809 1504,854 1561.5,911.5 R30.1 1680,955 1795,1070 C14.1@1795,1325 ; R32.2 1661.5,1378.5 1677.24,1362.76 U5.6 ; U5.5 U5.6 ; C15.1 1814.69,1363.5 C14.1 C14.1@1795,1325 ; U5.6 1792.4,1322.4 C14.1@1795,1325
  Bottom Layer w10: v1(1235,805) v1(1305,805)
MIC_PWR_ALT: J1.31 R3.2 | length 1936.3
  Top Layer w10: R3.2 534.19,649.31 534.19,185.81 560,160 1950,160 J1.31
MIC_PWR_PRI: J1.5 R1.2 | length 297.9
  Top Layer w10: J1.5 300,700 395,700 440,745 R1.2
MIC_RAW: C19.1 R34.1 U3.10 | length 585.4
  Top Layer w10: U3.10 1146.02,916.02 1170,940 R34.1 1208.5,1038.5 1315,1145 1315,1195 1355,1235 C19.1
NetC1_2: C1.2 S1.1 | length 125.3
  Top Layer w15: S1.1 804.45,1560.55 C1.2
NetC6_1: C6.1 J5.5 R19.2 | length 529.1
  Top Layer w10: J5.5 1240,455 1436.5,455 C6.1 1537.34,498.5 1600,561.16 R19.2
NetC8_2: C8.2 R24.2 | length 92
  Top Layer w10: C8.2 R24.2
NetC9_1: C9.1 R24.1 R26.1 U5.4 | length 225
  Top Layer w10: R24.1 C9.1 R26.1 1671.5,1206.5 1677.24,1212.24 U5.4
NetC9_2: C9.2 R26.2 R36.1 U5.1 | length 375.2
  Top Layer w10: R36.1 R26.2 ; U5.1 1612.28,1322.4 1630,1304.69 1630,1225 1608.5,1203.5 R26.2 ; C9.2 R26.2
NetC10_1: C10.1 R25.1 R29.2 U4.4 | length 575.6
  Top Layer w10: R29.2 R25.1 C10.1 313.5,1896.5 519,1691 519,1601 540.35,1579.65 U4.4
NetC11_1: C11.1 R29.1 | length 788.7
  Top Layer w10: R29.1 190,1295 278.5,1206.5 C11.1
NetC12_1: C12.1 U4.2 U4.3 | length 139.5
  Top Layer w10: C12.1 607.2,1681.3 U4.3 U4.2
NetC13_1: C13.1 R30.2 R34.2 | length 235.5
  Top Layer w10: R34.2 1363.82,940 C13.1 ; C13.1@1366.18,950 1371.18,955 R30.2
NetC19_2: C19.2 R35.1 R38.2 U5.3 | length 226.5
  Top Layer w10: R35.1 R38.2 C19.2 1530,1235 1542.6,1247.6 U5.3
NetC21_1: C21.1 R37.2 | length 60
  Top Layer w10: C21.1 R37.2
NetC22_2: C22.2 R32.1 R35.2 | length 278.2
  Top Layer w10: R35.2 1418.5,1452.01 C22.2 R32.1
NetJ5_2: J5.2 J5.4 R12.1 | length 287.4
  Top Layer w10: J5.4 1355,610 1388.5,643.5 R12.1 J5.2@1290,715
NetJ6_1: J6.1 U1.6 U1.15 | length 2221.1
  Top Layer w10: v1(1635,1810) 1635,1750 1655.16,1729.84 U1.6 ; J6.1 1616.34,2931.34 1580,2895 1580,2790 1620,2750 1659.58,2750 1704.58,2705 1805,2705 2059,2451 2059,1926.63 2002.37,1870 ; v1(1800,1870) 2002.37,1870 ; U1.15 1862.21,1729.84 2002.37,1870
  Bottom Layer w10: v1(1635,1810) 1695,1870 v1(1800,1870)
NetJ6_4: J6.4 U1.7 U1.14 | length 3192.2
  Top Layer w10: v1(1605,2625) 1735,2625 1770,2590 1770,2395 1750,2375 1637.35,2375 1455,2192.65 1455,1798.74 1488.74,1765 1590,1765 1644.84,1710.16 U1.7 ; v1(1605,2820) 1688.23,2820 J6.4 1689.33,2742.87 1711.2,2721 1811.63,2721 2075,2457.63 2075,1920 1866.47,1711.47 1865.83,1711.47 1864.52,1710.16 U1.14
  Bottom Layer w10: v1(1605,2625) v1(1605,2820)
NetJ6_5: J6.5 R21.1 | length 573.1
  Top Layer w15: R21.1 1538.5,2008.5 1600,2070 1835,2070 1864.53,2099.53 J6.5@1864.53,2260.35
NetR2_1: R2.1 U3.6 | length 103.5
  Top Layer w10: R2.1 783.11,941.61 U3.6
NetR7_1: R7.1 U3.5 | length 89.3
  Top Layer w10: R7.1 748.7,967.2 U3.5
NetR11_2: R11.2 U1.12 | length 136.5
  Top Layer w10: U1.12 1786.97,1658.5 1918.5,1658.5 R11.2
NetR13_2: R13.2 U2.2 | length 399.7
  Top Layer w10: R13.2 640.3,320 641.3,321 686,321 720,355 v1(720,490) ; v1(780,490) U2.2
  Bottom Layer w10: v1(720,490) v1(780,490)
NetR14_2: R14.2 U2.3 | length 1303.1
  Top Layer w10: U2.3@820,464.41 820,290 900.55,209.45 1309.45,209.45 1700,600 R14.2
NetR16_2: R16.2 U2.1 | length 1334.4
  Top Layer w10: U2.1 771.88,515.59 759,502.7 759,276 857.55,177.45 1730.95,177.45 R16.2
NetR18_2: R18.2 U1.8 | length 112.1
  Top Layer w10: R18.2 1592.32,1690.47 U1.8
NetR20_1: R20.1 U3.7 | length 136.2
  Top Layer w10: R20.1 772.18,870.69 772.18,902.18 786.02,916.02 U3.7
NetR25_2: R25.2 R27.1 | length 684.4
  Top Layer w10: R25.2 250,1395 312.48,1332.52 R27.1
ONBOARD_DAC_OUT: J5.1 U2.6 | length 461.7
  Top Layer w10: U2.6 903.31,684.21 930,710.9 1184.1,710.9 J5.1
ONBOARD_MIC: MIC1.1 U3.9 | length 529.6
  Top Layer w12: v1(1031.26,855) 1052.2,875.94 U3.9
  Bottom Layer w12: v1(1031.26,855) 1031.26,833.35 1032.4,832.2 MIC1.1@1032.4,370
PWM_ALT: J1.39 R10.2 | length 133.5
  Top Layer w10: R10.2 J1.39
PWM_AUDIO: R9.1 R10.1 R19.1 | length 408.6
  Top Layer w10: R19.1 1605,676.5 1605,845 1640,880 R9.1 R10.1
PWM_PRI: J1.19 R9.2 | length 262.5
  Top Layer w10: R9.2 1875,880 1895,900 2000,900 J1.19
SPEAKER_DET: C7.2 R21.2 R22.2 R23.1 TP2.1 U1.5 U3.16 | length 2170.8
  Top Layer w10: U3.16 TP2.1 1054.24,1315 v1(1250,1315) ; v1(1320,1315) 1320,1487.37 1327.63,1495 1810,1495 v1(1925,1610) ; R23.1 1688.5,1843.44 1695.94,1836 ; U1.5 1695.94,1836 ; v1(1925,1836) 1695.94,1836
  Top Layer w12: R22.2 R21.2 C7.2 R23.1
  Bottom Layer w10: v1(1250,1315) v1(1320,1315) ; v1(1925,1610) v1(1925,1836)
pads on no net: FID1.1 FID2.1 FID3.1 J6.6 J6.MH1 J6.MH2 S1. S?.0 SH-J1.0

## Polygon pours and split planes (outlines as drawn)
GND on Top Layer "Top Layer-GND" (solid, remove dead copper, pour order 5): 0,0 2300,0 2300,3000 0,3000
GND on Bottom Layer "Bottom Layer-GND" (solid, remove dead copper, pour order 7): 0,0 2300,0 2300,3000 0,3000

## Keep-outs
Keep-Out Layer:
  the board outline again, w10

## Silkscreen, mask and mechanical layers (free items; w line width, h text height)
Top Overlay:
  lines w6: 1324.72,840 910,840 910,570 1010,570 1010,445 1350,445 1350,798.54 ; 430,585 430,790 680,790 680,585 ; 430,585 680,585 ; 430,585 430,370 680,370 680,585 ; 1625,785 1885,785 1885,985 1625,985 1625,785 ; 1635,305 1635,520 1885,520 1885,305 1635,305
  lines w10: 200,100 200,1100 400,1100 400,100 200,100 ; 1900,100 2100,100 2100,1100 1900,1100 1900,100
  text "BOOSTXL-AUDIO" at 2177.37,1917.37 h60 r90
  text "Rev1.1" at 2250,1917.37 h40 r90
  text "J3" at 420,1135 h30
  text "J4" at 1825,1135 h30
  text "J2" at 2115,1135 h30
  text "*" at 1855,935 h30
  text "PWM AUD" at 2120,930 h25
  text "PWM_AUD" at 1665,810 h30
  text "DAC SEL" at 1000,780 h40
  text "SPI DAC" at 925,685 h30
  text "*" at 445,660 h30
  text "MIC PWR" at 15.29,628.32 h25
  text "MIC_PWR" at 470,600 h30
  text "LP DAC" at 945,595 h30
  text "D MOSI" at 2120,530 h25
  text "MIC OUT" at 15.29,528.32 h25
  text "PWM" at 1032.4,485 h30
  text "*" at 440,455 h30
  text "*" at 1855,455 h30
  text "D SCLK" at 15.29,428.32 h25
  text "MIC_OUT" at 475,390 h30
  text "AMP_ON" at 1690,330 h30
  text "AMP ON" at 2120,330 h25
  text "D SYNC" at 2120,230 h25
  text "LP_DAC" at 420,130 h25
Bottom Overlay:
  text "J1" at 190,1135 h30
  text "J3" at 470,1135 h30
  text "J4" at 1881.98,1128 h30
  text "J2" at 2171.98,1128 h30
  text "1" at 260,1120 h30
  text "21" at 370,1120 h30
  text "40" at 1975,1120 h30
  text "20" at 2080,1120 h30
  text "PWM AUD*" at 1885,930 h25
  text "PWM AUD" at 2285,930 h25
  text "AUD ON*" at 1885,830 h25
  text "MIC PWR" at 177,628.32 h25
  text "MIC OUT*" at 630,530 h25
  text "D MOSI" at 2255,530 h25
  text "MIC OUT" at 177,528.32 h25
  text "D SCLK" at 177,428.32 h25
  text "AMP ON" at 2260,330 h25
  text "D SYNC" at 2260,230 h25
  text "MIC PWR*" at 1885,135 h25
  text "10" at 270,50 h30
  text "30" at 375,50 h30
  text "31" at 1970,50 h30
  text "11" at 2083,50 h30
Drill Guide:
  text ".Layer_Name" at 577,-858.49 h60
M1 Board Outline:
  the board outline again, w10
  text ".Layer_Name" at 577,-858.49 h60
M2 Board Dimensions:
  rectangle: 0,-275 125,-150
  rectangle: 125,-400 500,-275
  lines w7: 0,-275 1000,-275 ; 125,-400 125,-150 ; 250,-400 250,-150 ; 500,-400 500,-150 ; 750,-400 750,-150 ; 0,-400 1000,-400 1000,-150 0,-150 0,-400
  text ".Layer_Name" at 577,-858.49 h60
M3 3D STEP Top:
  text ".Layer_Name" at 577,-858.49 h60
M4 3D STEP Bottom:
  text ".Layer_Name" at 577,-858.49 h60
M5 Assembly Top:
  lines w10: -292,-930.17 6308,-930.17 ; -292,-726.83 6310,-726.83 ; -292,-523.5 -292,-1133.5 3713,-1133.5 6310,-1133.5 6310,-523.5 -291.5,-523.5 -291.5,-1133.5 1284,-1133.5 ; 2173,-1133.5 2173,-523.5 ; 3440,-726.83 3440,-523.5 ; 4280,-726.83 4280,-523.5 ; 4902,-1140 4902,-937.17
  text "COMPONENTS MARKED 'DNP' SHOULD NOT BE POPULATED." at 1153.5,-318.5 h60
  text "ASSEMBLY VARIANT:" at 1153,-434 h60
  text ".VariantName" at 2189,-434 h60
  text "PCB VIEWED FROM TOP SIDE" at -228.5,-655.67 h60
  text "BOARD #:" at 2248,-655.67 h60
  text ".PRJ_Number" at 2793.5,-655.67 h60
  text "REV:" at 3638,-655.67 h60
  text ".PCB_Rev" at 3929.5,-655.67 h60
  text "SVN REV:" at 4476,-655.67 h60
  text ".VersionControl_RevNumber" at 4982,-655.67 h60
  text "PLOT NAME =" at -228.5,-1064.34 h60
  text ".plot_File_Name" at 577,-1064.34 h60
  text "GENERATED    :" at 2250,-1064.34 h60
  text ".Print_Date" at 3119.5,-1064.34 h60
  text ".Print_Time" at 3848.5,-1064.34 h60
  text "TEXAS INSTRUMENTS" at 5113,-1064.34 h60
M6 Assembly Bottom:
  lines w10: -292.5,-727.33 6309.5,-727.33 ; -290.5,-930.67 6309.5,-930.67 ; 1115.5,-1140.5 1115.5,-937.67 ; 1737.5,-727.33 1737.5,-524 ; 2577.5,-727.33 2577.5,-524 ; 3844.5,-1134 3844.5,-524 ; 4733.5,-1134 6309,-1134 6309,-524 -292.5,-524 -292.5,-1134 2304.5,-1134 6309.5,-1134 6309.5,-524
  text "COMPONENTS MARKED 'DNP' SHOULD NOT BE POPULATED." at 6102,-318 h60
  text ".VariantName" at 5058,-434 h60
  text "ASSEMBLY VARIANT:" at 6097,-434 h60
  text ".VersionControl_RevNumber" at 1035.5,-656.17 h60
  text "SVN REV:" at 1541.5,-656.17 h60
  text ".PCB_Rev" at 2088,-656.17 h60
  text "REV:" at 2379.5,-656.17 h60
  text ".PRJ_Number" at 3224,-656.17 h60
  text "BOARD #:" at 3769.5,-656.17 h60
  text "PCB VIEWED FROM BOTTOM SIDE" at 6246,-656.17 h60
  text "TEXAS INSTRUMENTS" at 904.5,-1064.84 h60
  text ".Print_Time" at 2169,-1064.84 h60
  text ".Print_Date" at 2898,-1064.84 h60
  text "GENERATED    :" at 3767.5,-1064.84 h60
  text ".plot_File_Name" at 5440.5,-1064.84 h60
  text "PLOT NAME =" at 6246,-1064.84 h60
M9 Title Sheet:
  drawing of 57 lines, arcs and shapes, not listed
  text "1" at 739.84,8036.5 h70
  text "2" at 3235.5,8036.5 h70
  text "3" at 5724.84,8036.5 h70
  text "4" at 8231.51,8036.5 h70
  text "5" at 10730.5,8036.5 h70
  text "6" at 13235.5,8036.5 h70
  text "A" at -416.5,6893.5 h70
  text "A" at 14383.5,6893.5 h70
  text "B" at -416.5,4513.5 h70
  text "B" at 14383.5,4513.5 h70
  text "C" at -416.5,2138.5 h70
  text "C" at 14383.5,2138.5 h70
  text "PROJECT TITLE:" at 11343.5,277.5 h45
  text ".PRJ_Title" at 11393.5,144.17 h70
  text "DESIGNED FOR:" at 11343.5,-23.5 h45
  text ".PRJ_Customer" at 11393.5,-163.5 h70
  text "D" at -416.5,-231.5 h70
  text "D" at 14383.5,-231.5 h70
  text "FILE NAME:" at 11343.5,-323.5 h45
  text ".PCB_File_Name_No_Path" at 11393.5,-443.5 h70
  text "Texas Instruments (TI) and/or its licensors do not warrant the accuracy or completeness of this specification" at 6374,-605.34 h45
  text "ENGINEER:" at 11343.5,-613.5 h45
  text "LAYOUT BY:" at 12848.5,-613.5 h45
  text "or any information contained therein. TI and/or its licensors do not warrant that this design will meet" at 6329.01,-718 h45
  text ".PRJ_Engineer" at 11393.5,-768.49 h70
  text ".PCB_Layout" at 12899,-768.49 h70
  text "the specifications, will be suitable for your application or fit for any particular purpose, or will operate in" at 6329.01,-830.67 h45
  text ".Layer_Name" at 577,-858.49 h60
  text "ALTIUM DESIGNER VERSION:" at 12848.5,-923.5 h45
  text "an implementation. TI and/or its licensors do not warrant that the design is production worthy. You should" at 6329.01,-943.33 h45
  text "completely validate and test your design implementation to confirm the system functionality for your application." at 6374,-1056 h45
  text ".print_Scale" at 11393.5,-1056.83 h70
  text ".Application_BuildNumber" at 12899,-1056.83 h70
  text "1" at 739.84,-1263.5 h70
  text "2" at 3235.5,-1263.5 h70
  text "3" at 5724.84,-1263.5 h70
  text "4" at 8231.51,-1263.5 h70
  text "5" at 10730.5,-1263.5 h70
  text "6" at 13235.5,-1263.5 h70
M10 Fab Notes:
  drawing of 185 lines, arcs and shapes, not listed
  text "DESIGN INFORMATION" at 12381.02,5910 h60
  text "MIN. TRACK WIDTH:" at 11736.46,5730 h60
  text "8" at 12832.7,5730 h60
  text "MIL" at 12987.46,5730 h60
  text "MIN. CLEARANCE:" at 11736.46,5598 h60
  text "0.2" at 12772.7,5598 h60
  text "mm" at 12987.46,5598 h60
  text "MIN. VIA PAD SIZE:" at 11736.46,5466 h60
  text "10" at 12802.71,5466 h60
  text "MIL" at 12987.46,5466 h60
  text "0.05mm (2MIL)" at 12431.46,5324.29 h60
  text "MINIMUM ANNULAR RING" at 11407.23,5320 h60
  text "EXTERNAL" at 13139.46,5320 h60
  text "PER" at 11607.23,5202 h60
  text "IPC-D-275 CLASS 2 LEVEL C" at 11827.23,5202 h60
  text "MIL, HOLES" at 13315.46,5089.71 h60
  text "+/-" at 12923,5089 h60
  text "+/-" at 13777,5089 h60
  text "REGISTRATION TOLERANCES:" at 11407.23,5084 h60
  text "METAL" at 12607,5084 h60
  text "5" at 13183.2,5084 h60
  text "3" at 14016.2,5084 h60
  text "MIL" at 14132.46,5084 h60
  text "MATERIAL:" at 11332.46,4874.54 h60
  text "FR-4 High Tg" at 12318.9,4734.21 h60
  text "FR-408" at 11753.46,4725.64 h60
  text "X" at 12165.46,4725.64 h60
  text "OTHER" at 13241.46,4725.64 h60
  text "62 MIL (1.6mm) +/-10%" at 12073.56,4562.92 h60
  text "THICKNESS:" at 11407.23,4558.64 h60
  text "X" at 11945.4,4558.64 h60
  text "OTHER" at 13358.46,4558.64 h60
  text "TOLERANCE:" at 11407.23,4400.64 h60
  text "X" at 12246.53,4400.64 h60
  text "ANSI IPC-6012 TYPE 3 CLASS 2" at 12433.48,4400.64 h60
  text "OTHER +/-" at 12433.46,4244.64 h60
  text "BOW & TWIST:" at 11407.23,4087.64 h60
  text "X" at 12246.53,4087.64 h60
  text "ANSI IPC-6012 TYPE 3 CLASS 2" at 12433.48,4087.64 h60
  text "OTHER +/-" at 12433.46,3929.13 h60
  text "DRILLING:" at 11332.46,3790.64 h60
  text "REFERENCE:" at 11407.23,3673.64 h60
  text "X" at 12055.46,3673.64 h60
  text "AS SHOWN" at 12242.46,3673.64 h60
  text "X" at 12956.46,3673.64 h60
  text "NC_DRILL FILES" at 13093.46,3673.64 h60
  text "PTH MIN COPPER THICKNESS:" at 11407.23,3515.64 h60
  text "X" at 12757.46,3515.64 h60
  text "1MIL" at 12894.46,3515.64 h60
  text "OTHER" at 13391.46,3515.64 h60
  text "BOARD FINISH:" at 11332.46,3356.64 h60
  text "SILKSCREEN:" at 11487.68,3238.64 h60
  text "X" at 12436.46,3238.64 h60
  text "TOP" at 12562.46,3238.64 h60
  text "X" at 12946.46,3238.64 h60
  text "BOTTOM" at 13073.46,3238.64 h60
  text "SILKSCREEN COLOR:" at 11487.68,3071.64 h60
  text "X" at 12435.42,3071.64 h60
  text "WHITE" at 12562.46,3071.64 h60
  text "OTHER" at 13073.46,3071.64 h60
  text "SOLDER RESIST COLOR:" at 11487.68,2901.64 h60
  text "GREEN" at 12182.46,2742.44 h60
  text "BLUE" at 12773.46,2742.44 h60
  text "X" at 13158.42,2742.44 h60
  text "OTHER" at 13311.46,2742.44 h60
  text "RED" at 13649.16,2728.65 h60
  text "IMMERSION GOLD (ENIG)" at 12393.46,2553.92 h60
  text "ENEPIG" at 13731,2550.64 h60
  text "SURFACE FINISH:" at 11332.46,2549.64 h60
  text "IMM. TIN/SILVER OR EQUIV" at 11662,2392.64 h60
  text "OTHER" at 13093.46,2392.64 h60
  text "X" at 11495,2390 h60
  text "ARRAY/PANEL:" at 11332.46,2213.64 h60
  text "CUT AND TRIM PER MECH LAYER 1" at 12393.46,2209.35 h60
  text "N.C. ROUTE" at 12393.46,2057.64 h60
  text "X" at 13072.46,2057.64 h60
  text "V. SCORE" at 13259.46,2057.64 h60
  text "CERTIFICATION:" at 11332.46,1920.64 h60
  text "MATERIALS AND WORKMANSHIP FOR ALL PCBS" at 12057.46,1920.64 h60
  text "TO MEET OR EXCEED THE REQUIREMENTS OF:" at 12057.46,1822.64 h60
  text "X" at 11683.96,1686.13 h60
  text "ANSI IPC-A-600F CLASS ->" at 11822.96,1686.13 h60
  text "X" at 13462.02,1686.13 h60
  text "2" at 13580.96,1686.14 h60
  text "1" at 13265.96,1684.64 h60
  text "3" at 13934.96,1684.64 h60
  text "X" at 11686.02,1526.64 h60
  text "UL 94V-0" at 11822.96,1526.64 h60
  text "X" at 12498.02,1526.64 h60
  text "RoHS" at 12634.96,1526.64 h60
  text "OTHER" at 13279.36,1526.64 h60
  text "PER ORDER" at 13676.42,1526.64 h60
  text "ADDITIONAL REQUIREMENTS:" at 11332.46,1385.64 h60
  text "MICROSECTION:" at 11407.23,1270.64 h60
  text "YES" at 12312.96,1270.64 h60
  text "REQUIRED" at 13174.46,1114.49 h60
  text "BARE BOARD ELEC. TEST:" at 11407.23,1111.64 h60
  text "NONE" at 12712.96,1111.64 h60
  text "X" at 13047.46,1111.64 h60
  text "PER ORDER" at 13766.46,1111.64 h60
  text "MANUFACTURER'S UL:" at 11407.23,954.64 h60
  text "RAIL" at 12572.96,950.35 h60
  text "METAL" at 13064.77,950.35 h60
  text "X" at 13440,950 h60
  text "SILK" at 13576.46,950.35 h60
  text ".Layer_Name" at 577,-858.49 h60
M11 Gerber Information:
  lines w10: -292,-930.17 6308,-930.17 ; -292,-726.83 6310,-726.83 ; -292,-523.5 -292,-1133.5 3713,-1133.5 6310,-1133.5 6310,-523.5 -291.5,-523.5 -291.5,-1133.5 1284,-1133.5 ; 2173,-1133.5 2173,-523.5 ; 3440,-726.83 3440,-523.5 ; 4280,-726.83 4280,-523.5 ; 4902,-1140 4902,-937.17
  text "ALL ARTWORK VIEWED FROM TOP SIDE" at -228.5,-655.67 h60
  text "BOARD #:" at 2248,-655.67 h60
  text ".PRJ_Number" at 2793.5,-655.67 h60
  text "REV:" at 3638,-655.67 h60
  text ".PCB_Rev" at 3929.5,-655.67 h60
  text "SVN REV:" at 4476,-655.67 h60
  text ".VersionControl_RevNumber" at 4982,-655.67 h60
  text "LAYER NAME =" at -228.5,-858.49 h60
  text "PLOT NAME =" at -228.5,-1064.34 h60
  text ".plot_File_Name" at 577,-1064.34 h60
  text "GENERATED    :" at 2250,-1064.34 h60
  text ".Print_Date" at 3119.5,-1064.34 h60
  text ".Print_Time" at 3848.5,-1064.34 h60
  text "TEXAS INSTRUMENTS" at 5113,-1064.34 h60
M12 Stackup:
  drawing of 191 lines, arcs and shapes, not listed
  text "Layer" at 9790.34,7830 h60
  text "Name" at 10200.26,7830 h60
  text "Material" at 11130,7830 h60
  text "Thickness" at 11989.77,7830 h60
  text "Constant" at 12639.6,7830 h60
  text "Board Layer Stack" at 13209.46,7830 h60
  text "1" at 9790.34,7710 h60
  text "Top Overlay" at 10200.26,7710 h60
  text "2" at 9790.34,7590 h60
  text "Top Solder" at 10200.26,7590 h60
  text "Solder Resist" at 11130,7590 h60
  text "0.40mil" at 11989.77,7590 h60
  text "3.5" at 12639.6,7590 h60
  text "3" at 9790.34,7470 h60
  text "Top Layer" at 10200.26,7470 h60
  text "Copper" at 11130,7470 h60
  text "1.40mil" at 11989.77,7470 h60
  text "4" at 9790.34,7350 h60
  text "Dielectric1" at 10200.26,7350 h60
  text "FR-4" at 11130,7350 h60
  text "59.20mil" at 11989.77,7350 h60
  text "4.8" at 12639.6,7350 h60
  text "5" at 9790.34,7230 h60
  text "Bottom Layer" at 10200.26,7230 h60
  text "Copper" at 11130,7230 h60
  text "1.40mil" at 11989.77,7230 h60
  text "6" at 9790.34,7110 h60
  text "Bottom Solder" at 10200.26,7110 h60
  text "Solder Resist" at 11130,7110 h60
  text "0.40mil" at 11989.77,7110 h60
  text "3.5" at 12639.6,7110 h60
  text "7" at 9790.34,6990 h60
  text "Bottom Overlay" at 10200.26,6990 h60
  text ".Layer_Name" at 577,-858.49 h60
M13 Component Bodies Top:
  text ".Layer_Name" at 577,-858.49 h60
M14 Component Bodies Bottom:
  text ".Layer_Name" at 577,-858.49 h60
M15 Courtyards Top:
  text ".Layer_Name" at 577,-858.49 h60
M16 Courtyards Bottom:
  text ".Layer_Name" at 577,-858.49 h60
Drill Drawing:
  circle w1: c5677.9,2511.18 r12.46
  circle w1: c5677.9,2511.18 r20.77
  lines w1: 5657.13,2282.7 5698.67,2282.7 5677.9,2241.16 5657.13,2282.7 ; 5657.13,2386.56 5677.9,2365.79 5698.67,2386.56 5677.9,2407.33 5657.13,2386.56 ; 5657.13,2656.57 5698.67,2656.57 5677.9,2615.03 5657.13,2656.57 ; 5657.13,2750.04 5667.51,2750.04 5667.51,2739.65 5688.28,2739.65 5688.28,2750.04 5698.67,2750.04 5698.67,2770.81 5688.28,2770.81 5688.28,2781.19 5667.51,2781.19 5667.51,2770.81 5657.13,2770.81 5657.13,2750.04 ; 5657.13,2864.27 5698.67,2864.27 5698.67,2905.82 5657.13,2905.82 5657.13,2864.27 ; 5657.13,2988.9 5698.67,2988.9 5698.67,3030.44 5657.13,3030.44 5657.13,2988.9 ; 5657.13,3113.52 5657.13,3123.9 5667.51,3134.29 5657.13,3144.68 5657.13,3155.06 5667.51,3155.06 5677.9,3144.68 5688.28,3155.06 5698.67,3155.06 5698.67,3144.68 5688.28,3134.29 5698.67,3123.9 5698.67,3113.52 5688.28,3113.52 5677.9,3123.9 5667.51,3113.52 5657.13,3113.52 ; 5657.13,3238.14 5677.9,3248.53 5698.67,3238.14 5688.28,3258.91 5698.67,3279.68 5677.9,3269.3 5657.13,3279.68 5667.51,3258.91 5657.13,3238.14 ; 5665.44,2274.4 5690.36,2274.4 5677.9,2249.47 5665.44,2274.4 ; 5665.44,2872.58 5690.36,2872.58 5690.36,2897.51 5665.44,2897.51 5665.44,2872.58
  lines w12: 5600,2203.78 7629.11,2203.78 ; 5600,3325.38 7629.11,3325.38 ; 5948.13,2079.15 5948.13,3450 ; 6290.32,2079.15 6290.32,3450 ; 6937.06,2079.15 6937.06,3450 ; 7206.38,2079.15 7206.38,3450 ; 5600,2079.15 7629.11,2079.15 7629.11,3450 5600,3450 5600,2079.15
  text "Symbol" at 5674.77,3362.76 h72
  text "Quantity" at 5985.52,3362.76 h72
  text "Finished Hole Size" at 6327.7,3362.76 h72
  text "Plated" at 6974.45,3362.76 h72
  text "Hole Type" at 7243.77,3362.76 h72
  text "2" at 5985.52,3238.14 h60
  text "66.93mil (1.700mm)" at 6327.7,3238.14 h60
  text "NPTH" at 6974.45,3238.14 h60
  text "Round" at 7243.77,3238.14 h60
  text "2" at 5985.52,3113.52 h60
  text "86.61mil (2.200mm)" at 6327.7,3113.52 h60
  text "NPTH" at 6974.45,3113.52 h60
  text "Round" at 7243.77,3113.52 h60
  text "141" at 5985.52,2988.9 h60
  text "10.00mil (0.254mm)" at 6327.7,2988.9 h60
  text "PTH" at 6974.45,2988.9 h60
  text "Round" at 7243.77,2988.9 h60
  text "2" at 5985.52,2864.27 h60
  text "17.72mil (0.450mm)" at 6327.7,2864.27 h60
  text "PTH" at 6974.45,2864.27 h60
  text "Round" at 7243.77,2864.27 h60
  text "2" at 5985.52,2739.65 h60
  text "30.00mil (0.762mm)" at 6327.7,2739.65 h60
  text "PTH" at 6974.45,2739.65 h60
  text "Round" at 7243.77,2739.65 h60
  text "2" at 5985.52,2615.03 h60
  text "31.50mil (0.800mm)" at 6327.7,2615.03 h60
  text "PTH" at 6974.45,2615.03 h60
  text "Round" at 7243.77,2615.03 h60
  text "3" at 5985.52,2490.41 h60
  text "39.37mil (1.000mm)" at 6327.7,2490.41 h60
  text "PTH" at 6974.45,2490.41 h60
  text "Round" at 7243.77,2490.41 h60
  text "46" at 5985.52,2365.79 h60
  text "40.00mil (1.016mm)" at 6327.7,2365.79 h60
  text "PTH" at 6974.45,2365.79 h60
  text "Round" at 7243.77,2365.79 h60
  text "2" at 5985.52,2241.16 h60
  text "55.12mil (1.400mm)" at 6327.7,2241.16 h60
  text "PTH" at 6974.45,2241.16 h60
  text "Round" at 7243.77,2241.16 h60
  text "202 Total" at 5985.52,2116.54 h60
  text ".Layer_Name" at 577,-858.49 h60

## Dimensions
0,-400 to 1000,-400 on M2 Board Dimensions
0,0 to 2300,0 on M2 Board Dimensions
0,0 to 0,3000 on M2 Board Dimensions

## Text inside footprints (layer, text, board x,y; h text height)
J1: Top Overlay "20" at 2025,1120 h30; Top Overlay "11" at 2033,50 h30; Top Overlay "10" at 228,50 h30; Top Overlay "1" at 245,1120 h30; Top Overlay "21" at 330,1120 h30; Top Overlay "30" at 325,50 h30; Top Overlay "31" at 1930,50 h30; Top Overlay "40" at 1925,1120 h30
Logo2: Bottom Overlay "Pb" at 1644.6,71.1 h60
Logo3: Bottom Overlay "For evaluation only; not FCC approved for resale" at 1535,75 h40
S1: Top Overlay "-" at 1040.67,1672.52 h40 r90; Top Overlay "+" at 804.45,1672.52 h40 r90
ZZ1: M5 Assembly Top "Install label in silkscreened box after final wash.  Text shall be 8 pt font.  Text shall be per the Label Table in the PDF schematic." at 230,3918 h40